# EAGLE board CPaper (EAGLE 7.3.0)
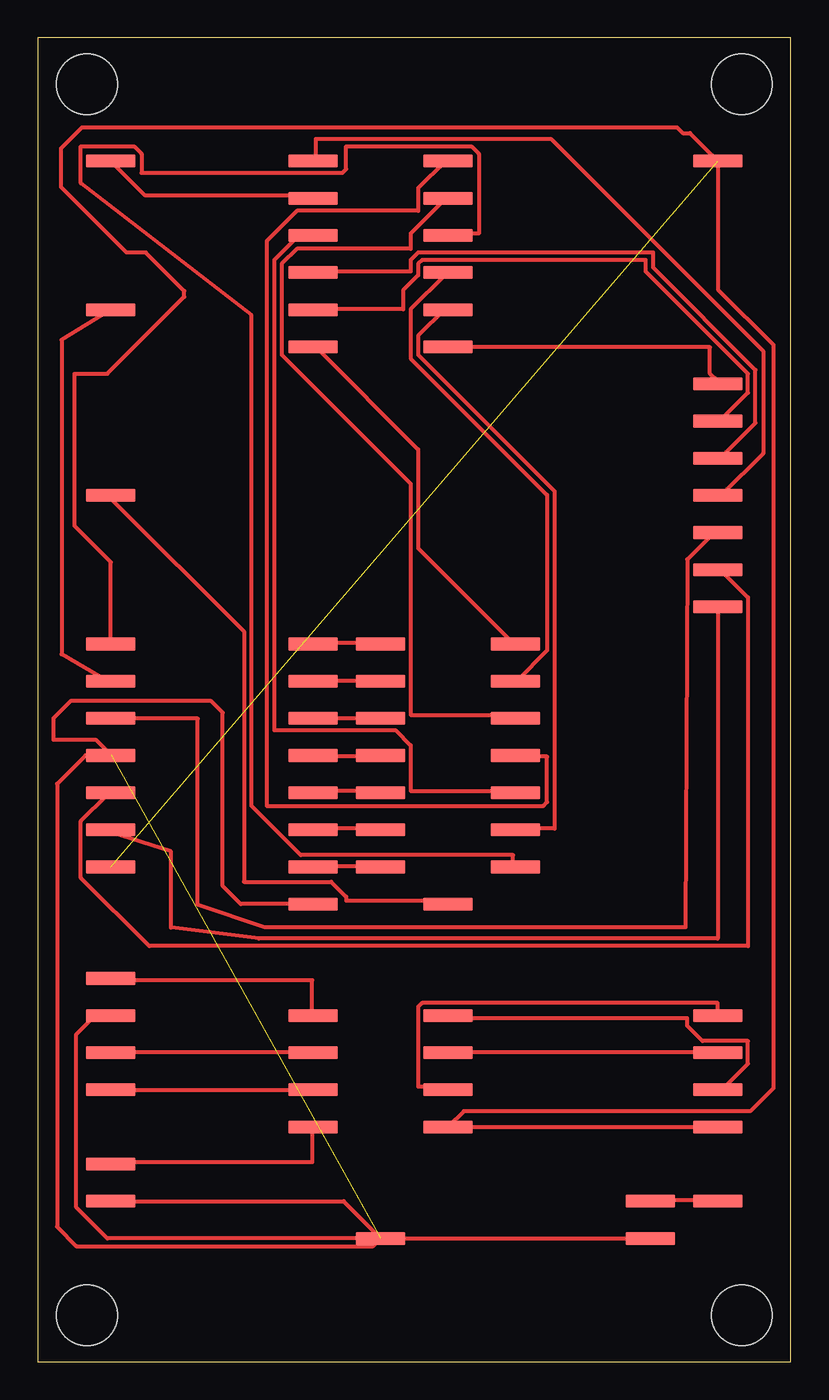
[diagram p0: board, top side]

Size 49.68 x 87.3 mm. Coordinates in mm from the lower left corner, seen from the top.
Outline: 0,0 49.68,0 49.68,87.3 0,87.3 0,0
Copper layers (1*16): Top 0.035mm / dielectric 1.5mm / Bottom 0.035mm
Design rules "default": minimum track width 10mil, minimum drill 24mil, track to track 8mil, track to pad 8mil, pad to pad 8mil, via to via 8mil, smd to smd 8mil, copper to edge 40mil, drill to drill 8mil, minimum pad ring 10mil, minimum via ring 8mil, stop-mask expansion 4mil, vias tented up to drill 0mil, thermal gap 10mil
Holes 4 mm at 3.24,3.05 3.24,84.25 46.44,84.25 46.44,3.05

## Footprints (pad centres in the part's own frame; a part is rotated, then mirrored left to right if it is on the bottom)
1X01_SMD_3.25X0.85MM_NO_SILK = smd 3.25 x 0.85: P$3 0,0

## Placement (x,y rotation side)
JP1  [1X01_SMD_3.25X0.85MM_NO_SILK]  4.81,79.18 0 top
JP2  [1X01_SMD_3.25X0.85MM_NO_SILK]  18.16,76.73 0 top
JP3  [1X01_SMD_3.25X0.85MM_NO_SILK]  18.16,79.18 0 top
JP4  [1X01_SMD_3.25X0.85MM_NO_SILK]  44.86,57.12 0 top
JP5  [1X01_SMD_3.25X0.85MM_NO_SILK]  44.86,79.18 0 top
JP6  [1X01_SMD_3.25X0.85MM_NO_SILK]  27.07,15.47 0 top
JP7  [1X01_SMD_3.25X0.85MM_NO_SILK]  44.86,79.18 0 top
JP8  [1X01_SMD_3.25X0.85MM_NO_SILK]  4.81,47.32 0 top
JP9  [1X01_SMD_3.25X0.85MM_NO_SILK]  44.86,79.18 0 top
JP10  [1X01_SMD_3.25X0.85MM_NO_SILK]  4.81,32.62 0 top
JP11  [1X01_SMD_3.25X0.85MM_NO_SILK]  27.07,79.18 0 top
JP12  [1X01_SMD_3.25X0.85MM_NO_SILK]  31.51,39.98 0 top
JP13  [1X01_SMD_3.25X0.85MM_NO_SILK]  27.07,76.73 0 top
JP14  [1X01_SMD_3.25X0.85MM_NO_SILK]  31.51,42.42 0 top
JP15  [1X01_SMD_3.25X0.85MM_NO_SILK]  27.07,74.28 0 top
JP16  [1X01_SMD_3.25X0.85MM_NO_SILK]  31.51,32.62 0 top
JP17  [1X01_SMD_3.25X0.85MM_NO_SILK]  27.07,71.83 0 top
JP18  [1X01_SMD_3.25X0.85MM_NO_SILK]  31.51,44.88 0 top
JP19  [1X01_SMD_3.25X0.85MM_NO_SILK]  27.07,69.38 0 top
JP20  [1X01_SMD_3.25X0.85MM_NO_SILK]  31.51,35.07 0 top
JP21  [1X01_SMD_3.25X0.85MM_NO_SILK]  27.07,66.93 0 top
JP22  [1X01_SMD_3.25X0.85MM_NO_SILK]  44.86,64.48 0 top
JP23  [1X01_SMD_3.25X0.85MM_NO_SILK]  18.16,74.28 0 top
JP24  [1X01_SMD_3.25X0.85MM_NO_SILK]  31.51,37.52 0 top
JP25  [1X01_SMD_3.25X0.85MM_NO_SILK]  18.16,71.83 0 top
JP26  [1X01_SMD_3.25X0.85MM_NO_SILK]  44.86,59.57 0 top
JP27  [1X01_SMD_3.25X0.85MM_NO_SILK]  18.16,69.38 0 top
JP28  [1X01_SMD_3.25X0.85MM_NO_SILK]  44.86,62.02 0 top
JP29  [1X01_SMD_3.25X0.85MM_NO_SILK]  4.81,69.38 0 top
JP30  [1X01_SMD_3.25X0.85MM_NO_SILK]  4.81,44.88 0 top
JP31  [1X01_SMD_3.25X0.85MM_NO_SILK]  18.16,66.93 0 top
JP32  [1X01_SMD_3.25X0.85MM_NO_SILK]  31.51,47.32 0 top
JP33  [1X01_SMD_3.25X0.85MM_NO_SILK]  4.81,57.12 0 top
JP34  [1X01_SMD_3.25X0.85MM_NO_SILK]  27.07,30.17 0 top
JP35  [1X01_SMD_3.25X0.85MM_NO_SILK]  44.86,54.67 0 top
JP36  [1X01_SMD_3.25X0.85MM_NO_SILK]  4.81,42.42 0 top
JP37  [1X01_SMD_3.25X0.85MM_NO_SILK]  44.86,52.23 0 top
JP38  [1X01_SMD_3.25X0.85MM_NO_SILK]  4.81,37.52 0 top
JP39  [1X01_SMD_3.25X0.85MM_NO_SILK]  44.86,49.77 0 top
JP40  [1X01_SMD_3.25X0.85MM_NO_SILK]  4.81,35.07 0 top
JP41  [1X01_SMD_3.25X0.85MM_NO_SILK]  18.16,47.32 0 top
JP42  [1X01_SMD_3.25X0.85MM_NO_SILK]  22.61,47.32 0 top
JP43  [1X01_SMD_3.25X0.85MM_NO_SILK]  18.16,44.88 0 top
JP44  [1X01_SMD_3.25X0.85MM_NO_SILK]  22.61,44.88 0 top
JP45  [1X01_SMD_3.25X0.85MM_NO_SILK]  18.16,42.42 0 top
JP46  [1X01_SMD_3.25X0.85MM_NO_SILK]  22.61,42.42 0 top
JP47  [1X01_SMD_3.25X0.85MM_NO_SILK]  18.16,39.98 0 top
JP48  [1X01_SMD_3.25X0.85MM_NO_SILK]  22.61,39.98 0 top
JP49  [1X01_SMD_3.25X0.85MM_NO_SILK]  18.16,37.52 0 top
JP50  [1X01_SMD_3.25X0.85MM_NO_SILK]  22.61,37.52 0 top
JP51  [1X01_SMD_3.25X0.85MM_NO_SILK]  18.16,35.07 0 top
JP52  [1X01_SMD_3.25X0.85MM_NO_SILK]  22.61,35.07 0 top
JP53  [1X01_SMD_3.25X0.85MM_NO_SILK]  18.16,32.62 0 top
JP54  [1X01_SMD_3.25X0.85MM_NO_SILK]  22.61,32.62 0 top
JP55  [1X01_SMD_3.25X0.85MM_NO_SILK]  4.81,39.98 0 top
JP56  [1X01_SMD_3.25X0.85MM_NO_SILK]  22.61,8.12 0 top
JP57  [1X01_SMD_3.25X0.85MM_NO_SILK]  18.16,30.17 0 top
JP58  [1X01_SMD_3.25X0.85MM_NO_SILK]  22.61,8.12 0 top
JP59  [1X01_SMD_3.25X0.85MM_NO_SILK]  4.81,25.27 0 top
JP60  [1X01_SMD_3.25X0.85MM_NO_SILK]  18.16,22.83 0 top
JP61  [1X01_SMD_3.25X0.85MM_NO_SILK]  4.81,22.83 0 top
JP62  [1X01_SMD_3.25X0.85MM_NO_SILK]  22.61,8.12 0 top
JP63  [1X01_SMD_3.25X0.85MM_NO_SILK]  4.81,20.38 0 top
JP64  [1X01_SMD_3.25X0.85MM_NO_SILK]  18.16,20.38 0 top
JP65  [1X01_SMD_3.25X0.85MM_NO_SILK]  4.81,17.92 0 top
JP66  [1X01_SMD_3.25X0.85MM_NO_SILK]  18.16,17.92 0 top
JP67  [1X01_SMD_3.25X0.85MM_NO_SILK]  27.07,22.83 0 top
JP68  [1X01_SMD_3.25X0.85MM_NO_SILK]  44.86,17.92 0 top
JP69  [1X01_SMD_3.25X0.85MM_NO_SILK]  27.07,20.38 0 top
JP70  [1X01_SMD_3.25X0.85MM_NO_SILK]  44.86,20.38 0 top
JP71  [1X01_SMD_3.25X0.85MM_NO_SILK]  27.07,17.92 0 top
JP72  [1X01_SMD_3.25X0.85MM_NO_SILK]  44.86,22.83 0 top
JP73  [1X01_SMD_3.25X0.85MM_NO_SILK]  27.07,15.47 0 top
JP74  [1X01_SMD_3.25X0.85MM_NO_SILK]  44.86,15.47 0 top
JP75  [1X01_SMD_3.25X0.85MM_NO_SILK]  4.81,13.03 0 top
JP76  [1X01_SMD_3.25X0.85MM_NO_SILK]  18.16,15.47 0 top
JP77  [1X01_SMD_3.25X0.85MM_NO_SILK]  4.81,10.58 0 top
JP78  [1X01_SMD_3.25X0.85MM_NO_SILK]  22.61,8.12 0 top
JP79  [1X01_SMD_3.25X0.85MM_NO_SILK]  44.86,10.58 0 top
JP80  [1X01_SMD_3.25X0.85MM_NO_SILK]  40.42,10.58 0 top
JP81  [1X01_SMD_3.25X0.85MM_NO_SILK]  40.42,8.12 0 top
JP82  [1X01_SMD_3.25X0.85MM_NO_SILK]  22.61,8.12 0 top

## Library data of the parts
JP1-JP82 = SparkFun-Connectors

## Nets
NEW_0: JP1.P$3 JP2.P$3
NEW_1: JP3.P$3 JP4.P$3
NEW_2: JP5.P$3 JP6.P$3
NEW_3: JP7.P$3 JP8.P$3
NEW_4: JP9.P$3 JP10.P$3
NEW_5: JP11.P$3 JP12.P$3
NEW_6: JP13.P$3 JP14.P$3
NEW_7: JP15.P$3 JP16.P$3
NEW_8: JP17.P$3 JP18.P$3
NEW_9: JP19.P$3 JP20.P$3
NEW_10: JP21.P$3 JP22.P$3
NEW_11: JP23.P$3 JP24.P$3
NEW_12: JP25.P$3 JP26.P$3
NEW_13: JP27.P$3 JP28.P$3
NEW_14: JP29.P$3 JP30.P$3
NEW_15: JP31.P$3 JP32.P$3
NEW_16: JP33.P$3 JP34.P$3
NEW_17: JP35.P$3 JP36.P$3
NEW_18: JP37.P$3 JP38.P$3
NEW_19: JP39.P$3 JP40.P$3
NEW_20: JP41.P$3 JP42.P$3
NEW_21: JP43.P$3 JP44.P$3
NEW_22: JP45.P$3 JP46.P$3
NEW_23: JP47.P$3 JP48.P$3
NEW_24: JP49.P$3 JP50.P$3
NEW_25: JP51.P$3 JP52.P$3
NEW_26: JP53.P$3 JP54.P$3
NEW_27: JP55.P$3 JP56.P$3
NEW_28: JP57.P$3 JP58.P$3
NEW_29: JP59.P$3 JP60.P$3
NEW_30: JP61.P$3 JP62.P$3
NEW_31: JP63.P$3 JP64.P$3
NEW_32: JP65.P$3 JP66.P$3
NEW_33: JP67.P$3 JP68.P$3
NEW_34: JP69.P$3 JP70.P$3
NEW_35: JP71.P$3 JP72.P$3
NEW_36: JP73.P$3 JP74.P$3
NEW_37: JP75.P$3 JP76.P$3
NEW_38: JP77.P$3 JP78.P$3
NEW_39: JP79.P$3 JP80.P$3
NEW_40: JP81.P$3 JP82.P$3

## Tracks (layer width: path | path; a pad name or v marks a point on that pad's centre or on a via)
NEW_0
  Top 0.254: JP1.P$3 7.09,76.9 18.09,76.9 JP2.P$3
NEW_1
  Top 0.254: JP4.P$3 45.09,57.15 47.84,59.9 47.84,66.65 33.84,80.65 18.34,80.65 18.34,79.4 JP3.P$3
NEW_2
  Top 0.254: JP5.P$3 44.86,70.71 48.51,67.06 48.51,18.03 46.99,16.51 28.1,16.51 JP6.P$3
NEW_3
  Top 0.254: JP8.P$3 4.81,52.72 2.41,55.12 2.41,65.15 4.57,65.15 9.65,70.23 9.65,70.61 7.11,73.15 5.84,73.15 1.52,77.47 1.52,80.01 2.92,81.41 42.16,81.41 42.55,81.03 43.01,81.03 JP7.P$3
NEW_4  (1 unrouted)
NEW_5
  Top 0.254: JP12.P$3 31.59,39.9 33.59,39.9 33.59,36.9 33.34,36.65 15.09,36.65 15.09,73.9 17.09,75.9 25.09,75.9 25.09,77.4 26.84,79.15 JP11.P$3
NEW_6
  Top 0.254: JP14.P$3 31.34,42.65 24.59,42.65 24.59,57.9 16.09,66.4 16.09,72.4 17.09,73.4 24.59,73.4 24.59,74.4 26.84,76.65 JP13.P$3
NEW_7
  Top 0.254: JP15.P$3 27.09,74.4 29.09,74.4 29.09,79.65 28.59,80.15 20.34,80.15 20.34,78.65 20.09,78.4 6.84,78.4 6.84,79.65 6.34,80.15 2.84,80.15 2.84,77.71 14.09,69 14.09,36.65 17.34,33.4 31.34,33.4 31.34,32.65 JP16.P$3
NEW_8
  Top 0.254: JP18.P$3 31.59,44.9 33.59,46.9 33.59,57.15 24.59,66.15 24.59,69.4 26.84,71.65 JP17.P$3
NEW_9
  Top 0.254: JP20.P$3 31.59,35.15 34.09,35.15 34.09,57.4 25.09,66.4 25.09,67.65 26.84,69.4 JP19.P$3
NEW_10
  Top 0.254: JP21.P$3 27.09,66.9 44.34,66.9 44.34,65.15 44.84,64.65 JP22.P$3
NEW_11
  Top 0.254: JP24.P$3 31.34,37.65 24.59,37.65 24.59,40.65 23.59,41.65 15.59,41.65 15.59,72.65 17.09,74.15 18.09,74.15 JP23.P$3
NEW_12
  Top 0.254: JP25.P$3 18.34,71.9 24.59,71.9 24.59,72.65 25.09,73.15 40.59,73.15 40.59,72.15 47.34,65.4 47.34,61.9 45.09,59.65 JP26.P$3
NEW_13
  Top 0.254: JP27.P$3 18.34,69.4 24.09,69.4 24.09,70.65 25.09,71.65 25.09,72.4 25.34,72.65 40.09,72.65 40.09,71.9 46.84,65.15 46.84,63.9 45.09,62.15 JP28.P$3
NEW_14
  Top 0.254: JP29.P$3 1.57,67.4 1.57,46.65 4.59,44.9 JP30.P$3
NEW_15
  Top 0.254: JP32.P$3 31.34,47.4 25.09,53.65 25.09,60.15 18.34,66.9 JP31.P$3
NEW_16
  Top 0.254: JP34.P$3 26.84,30.4 20.34,30.4 20.34,30.65 19.34,31.65 13.59,31.65 13.59,48.15 4.84,56.9 JP33.P$3
NEW_17
  Top 0.254: JP36.P$3 4.84,42.4 10.55,42.4 10.55,30.13 14.96,28.64 42.71,28.64 42.84,52.9 44.84,54.9 JP35.P$3
NEW_18
  Top 0.254: JP38.P$3 4.59,37.4 2.84,35.65 2.84,31.9 7.34,27.4 46.84,27.4 46.84,50.4 45.09,52.15 JP37.P$3
NEW_19
  Top 0.254: JP40.P$3 4.84,34.9 8.78,33.63 8.78,28.63 14.59,27.9 44.84,27.9 44.84,49.65 JP39.P$3
NEW_20
  Top 0.254: JP41.P$3 18.34,47.4 22.59,47.4 JP42.P$3
NEW_21
  Top 0.254: JP43.P$3 18.34,44.9 22.59,44.9 JP44.P$3
NEW_22
  Top 0.254: JP45.P$3 18.34,42.4 22.59,42.4 JP46.P$3
NEW_23
  Top 0.254: JP47.P$3 18.34,39.9 22.59,39.9 JP48.P$3
NEW_24
  Top 0.254: JP49.P$3 18.34,37.65 22.59,37.65 JP50.P$3
NEW_25
  Top 0.254: JP51.P$3 18.34,35.15 22.59,35.15 JP52.P$3
NEW_26
  Top 0.254: JP53.P$3 18.34,32.65 22.59,32.65 JP54.P$3
NEW_27
  Top 0.254: JP55.P$3 3.14,39.98 1.27,38.1 1.27,8.89 2.54,7.62 22.11,7.62 JP56.P$3
NEW_28  (1 unrouted)
  Top 0.254: JP57.P$3 13.39,30.17 12.19,31.37 12.19,42.8 11.43,43.56 2.16,43.56 1.02,42.42 1.02,41.02 3.81,41.02 4.83,40
NEW_29
  Top 0.254: JP59.P$3 4.84,25.15 18.09,25.15 18.09,22.9 JP60.P$3
NEW_30
  Top 0.254: JP62.P$3 4.57,8.12 2.54,10.16 2.54,21.59 3.81,22.86 4.78,22.86 JP61.P$3
NEW_31
  Top 0.254: JP63.P$3 4.84,20.4 18.09,20.4 JP64.P$3
NEW_32
  Top 0.254: JP65.P$3 4.84,17.9 18.09,17.9 JP66.P$3
NEW_33
  Top 0.254: JP67.P$3 27.09,22.65 42.84,22.65 42.84,22.15 43.84,21.15 46.84,21.15 46.84,19.65 45.09,17.9 JP68.P$3
NEW_34
  Top 0.254: JP69.P$3 27.09,20.4 44.84,20.4 JP70.P$3
NEW_35
  Top 0.254: JP71.P$3 26.84,18.15 25.09,18.15 25.09,23.4 25.34,23.65 44.84,23.65 44.84,22.9 JP72.P$3
NEW_36
  Top 0.254: JP73.P$3 JP74.P$3
NEW_37
  Top 0.254: JP75.P$3 4.84,13.15 18.09,13.15 18.09,15.4 JP76.P$3
NEW_38
  Top 0.254: JP77.P$3 20.16,10.58 JP78.P$3
NEW_39
  Top 0.254: JP80.P$3 40.59,10.65 44.84,10.65 JP79.P$3
NEW_40
  Top 0.254: JP82.P$3 JP81.P$3